# Altium PCB Control_PCB.PcbDoc
Units mm, origin at the board's own origin, x right, y up, seen from the top; angles counter-clockwise.
Board outline 174.6 x 82.6 mm, 2 copper layers (Top Layer, Bottom Layer); 270 components, 208 nets, 853 pads, 0 vias.
Unrouted connection lines stored in the file: 547.
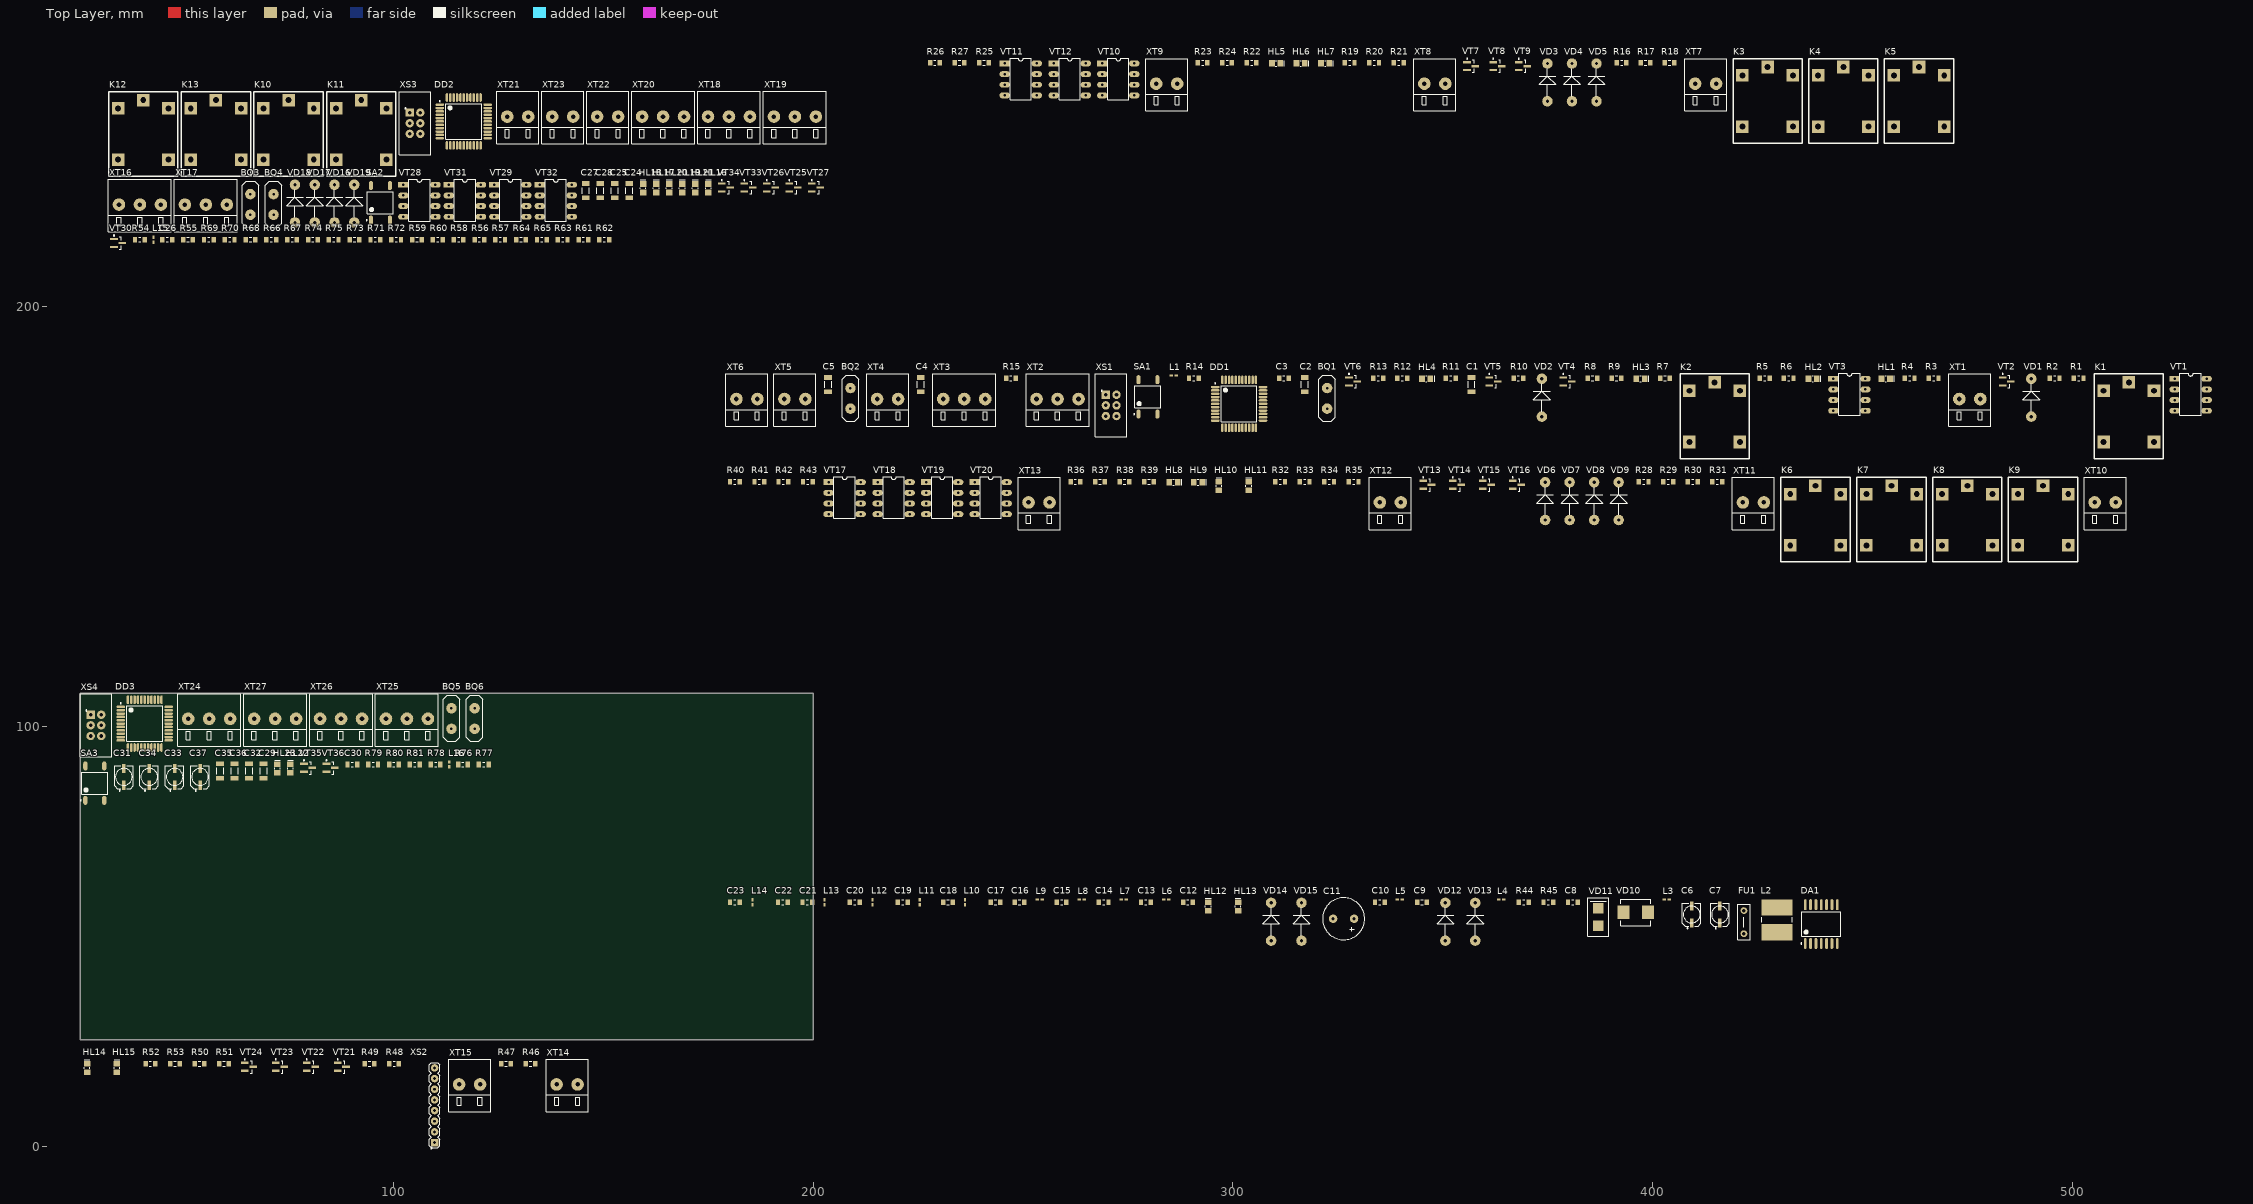
[diagram p0: Top Layer view]
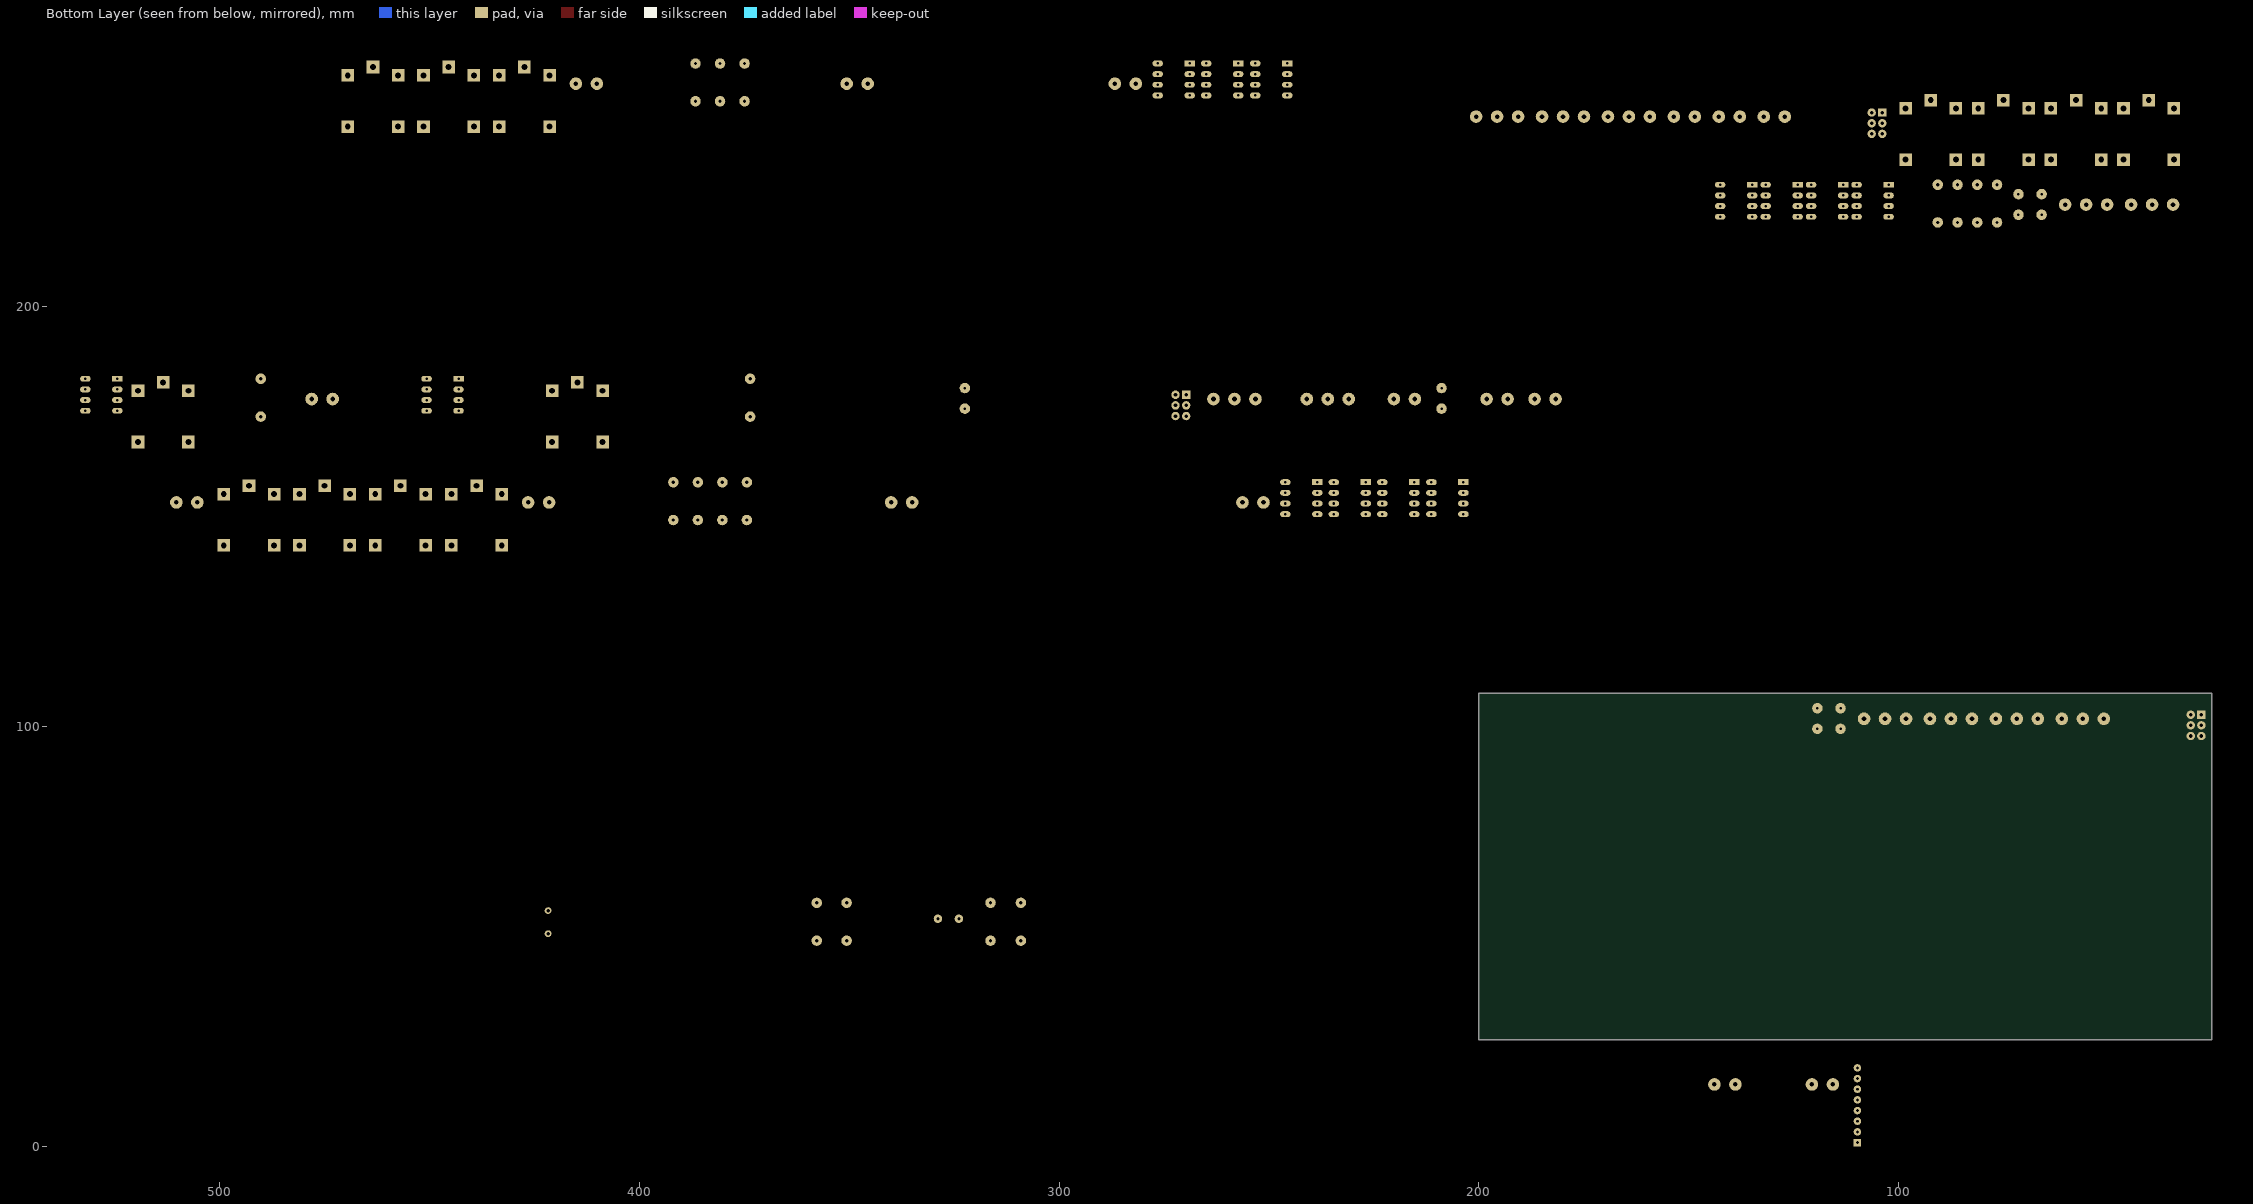
[diagram p1: Bottom Layer view, seen from below]

## Layer stack, top to bottom
Top Solder: solder mask 0.0102, Solder Resist, Dk 3.5
Top Layer: signal copper 0.0356
Dielectric 1: dielectric 0.32, FR-4, Dk 4.8
Bottom Layer: signal copper 0.0356
Bottom Solder: solder mask 0.0102, Solder Resist, Dk 3.5

## Board outline
25.4,25.4 200,25.4 200,108 25.4,108

## Design rules (kind name [scope] priority, off if disabled: settings)
Clearance [All] p1: gap=0.254
DiffPairsRouting [All] p1: maxlimit=0.254 minlimit=0.254 mostfreqgap=0.254 toplayer_minwidth=0.381 toplayer_maxwidth=0.381 toplayer_prefwidth=0.381 bottomlayer_minwidth=0.381 bottomlayer_maxwidth=0.381 bottomlayer_prefwidth=0.381 maxuncoupledlength=12.7
PolygonConnect [All] p1: connectstyle=Relief reliefconductorwidth=0.254 reliefentries=4 polygonreliefangle="90 Angle" airgapwidth=0.254
RoomDefinition Water_control_unit [InComponentClass('Water_control_unit')] p1: confinementstyle=ConfineIn formatcopy=TRUE lockcomponents=FALSE outline 178.943,163.576 533.527,163.576 533.527,186.944 178.943,186.944
RoomDefinition U_valveСontrol [InComponentClass('U_valveСontrol')] p2: confinementstyle=ConfineIn formatcopy=TRUE lockcomponents=FALSE outline 178.943,138.938 513.08,138.938 513.08,162.306 178.943,162.306
RoomDefinition U_heatersControl [InComponentClass('U_heatersControl')] p3: confinementstyle=ConfineIn formatcopy=TRUE lockcomponents=FALSE outline 226.623,238.696 472.114,238.696 472.114,262.064 226.623,262.064
RoomDefinition TopSCH [InComponentClass('TopSCH')] p4: confinementstyle=ConfineIn formatcopy=TRUE lockcomponents=FALSE outline 25.502,-1.37 146.66,-1.37 146.66,23.649 25.502,23.649
RoomDefinition Spin_control_unit [InComponentClass('Spin_control_unit')] p5: confinementstyle=ConfineIn formatcopy=TRUE lockcomponents=FALSE outline 31.781,207 204,207 204,251.937 31.781,251.937
RoomDefinition Power_unit [InComponentClass('Power_unit')] p6: confinementstyle=ConfineIn formatcopy=TRUE lockcomponents=FALSE outline 178.943,46.355 445.516,46.355 445.516,62.103 178.943,62.103
RoomDefinition Master_unit [InComponentClass('Master_unit')] p7: confinementstyle=ConfineIn formatcopy=TRUE lockcomponents=FALSE outline 25,79 125,79 125,108.482 25,108.482
RoutingVias [All] p1: holewidth=0.711 width=1.27 viastyle="Through Hole" minholewidth=0.711 minwidth=1.27 maxholewidth=0.711 maxwidth=1.27
SolderMaskExpansion [All] p1: expansion=0.102
Width [All] p1: maxlimit=0.254 minlimit=0.254 preferedwidth=0.254
28 further rules are at their usual default settings.

## Classes and differential pairs
component class Water_control_unit: BQ1 BQ2 C1 C2 C3 C4 C5 DD1 HL1 HL2 HL3 HL4 K1 K2 L1 R1 R2 R3 R4 R5 R6 R7 R8 R9 R10 R11 R12 R13 R14 R15 SA1 VD1 VD2 VT1 VT2 VT3 VT4 VT5 VT6 XS1 XT1 XT2 XT3 XT4 XT5 XT6
component class U_valveСontrol: HL8 HL9 HL10 HL11 K6 K7 K8 K9 R28 R29 R30 R31 R32 R33 R34 R35 R36 R37 R38 R39 R40 R41 R42 R43 VD6 VD7 VD8 VD9 VT13 VT14 VT15 VT16 VT17 VT18 VT19 VT20 XT10 XT11 XT12 XT13
component class U_heatersControl: HL5 HL6 HL7 K3 K4 K5 R16 R17 R18 R19 R20 R21 R22 R23 R24 R25 R26 R27 VD3 VD4 VD5 VT7 VT8 VT9 VT10 VT11 VT12 XT7 XT8 XT9
component class TopSCH: HL14 HL15 R46 R47 R48 R49 R50 R51 R52 R53 VT21 VT22 VT23 VT24 XS2 XT14 XT15
component class Spin_control_unit: BQ3 BQ4 C24 C25 C26 C27 C28 DD2 HL16 HL17 HL18 HL19 HL20 HL21 K10 K11 K12 K13 L15 R54 R55 R56 R57 R58 R59 R60 R61 R62 R63 R64 R65 R66 R67 R68 R69 R70 R71 R72 R73 R74 R75 SA2 VD16 VD17 VD18 VD19 VT25 VT26 VT27 VT28 VT29 VT30 VT31 VT32 VT33 VT34 XS3 XT16 XT17 XT18 XT19 XT20 XT21 XT22 XT23
component class Power_unit: C6 C7 C8 C9 C10 C11 C12 C13 C14 C15 C16 C17 C18 C19 C20 C21 C22 C23 DA1 FU1 HL12 HL13 L2 L3 L4 L5 L6 L7 L8 L9 L10 L11 L12 L13 L14 R44 R45 VD10 VD11 VD12 VD13 VD14 VD15
component class Master_unit: BQ5 BQ6 C29 C30 C31 C32 C33 C34 C35 C36 C37 DD3 HL22 HL23 L16 R76 R77 R78 R79 R80 R81 SA3 VT35 VT36 XS4 XT24 XT25 XT26 XT27
differential pair PRESSURE: +PRESSURE_P -PRESSURE_N

## Components (designator, comment, footprint, x,y, rotation, side; value= is the part's Value field where it differs from the comment)
BQ1 "16 МГц" HC-49/S 322.453,175.768 r90 top
BQ2 "32.768 кГц" HC-49/S 208.915,175.768 r90 top
BQ3 "16 МГц" HC-49/S 65.951,221.968 r90 top
BQ4 "32,768 кГц" HC-49/S 71.459,221.968 r90 top
BQ5 "16 МГц" HC-49/S 113.856,99.474 r90 top
BQ6 "32,768 кГц" HC-49/S 119.364,99.474 r90 top
C1 "CC0603JRNP09BN200" CAPC3216X05M 356.87,181.483 r90 top
C2 "CC0603JRNP09BN200" CAPC3216X05M 317.119,181.483 r90 top
C3 "100n" SMDRC0805 312.166,183.007 r0 top
C4 "CC0603JRNP09BN200" CAPC3216X05M 225.679,181.483 r90 top
C5 "CC0603JRNP09BN200" CAPC3216X05M 203.581,181.483 r90 top
C6 "CA050M2R20REB-0405" CAP_POLAR_ELLYTE_B 409.321,55.245 r90 top
C7 "CA016M0010REB-0405" CAP_POLAR_ELLYTE_B 416.052,55.245 r90 top
C8 "100n" SMDRC0805 381,58.166 r0 top
C9 "100n" SMDRC0805 345.059,58.166 r0 top
C10 "100n" SMDRC0805 335.026,58.166 r0 top
C11 "CA035M0220REG" CAP_POLAR_10mm 326.39,54.229 r0 top
C12 "100n" SMDRC0805 289.306,58.166 r0 top
C13 "100n" SMDRC0805 279.273,58.166 r0 top
C14 "100n" SMDRC0805 269.24,58.166 r0 top
C15 "100n" SMDRC0805 259.207,58.166 r0 top
C16 "100n" SMDRC0805 249.174,58.166 r0 top
C17 "100n" SMDRC0805 243.459,58.166 r0 top
C18 "100n" SMDRC0805 232.156,58.166 r0 top
C19 "100n" SMDRC0805 221.361,58.166 r0 top
C20 "100n" SMDRC0805 209.931,58.166 r0 top
C21 "100n" SMDRC0805 198.628,58.166 r0 top
C22 "100n" SMDRC0805 192.786,58.166 r0 top
C23 "100n" SMDRC0805 181.356,58.166 r0 top
C24 "CC0603JRNP09BN200" CAPC3216X05M 156.231,227.693 r90 top
C25 "CC0603JRNP09BN200" CAPC3216X05M 152.773,227.693 r90 top
C26 "100n" SMDRC0805 46.134,216.035 r0 top
C27 "CC0603JRNP09BN200" CAPC3216X05M 145.857,227.693 r90 top
C28 "CC0603JRNP09BN200" CAPC3216X05M 149.315,227.693 r90 top
C29 "CC0603JRNP09BN200" CAPC3216X05M 69.093,89.437 r90 top
C30 "100n" SMDRC0805 90.233,90.987 r0 top
C31 "CA050M2R20REB-0405" CAP_POLAR_ELLYTE_B 35.787,88.037 r90 top
C32 "CC0603JRNP09BN200" CAPC3216X05M 65.635,89.437 r90 top
C33 "CA050M2R20REB-0405" CAP_POLAR_ELLYTE_B 47.903,88.037 r90 top
C34 "CA050M2R20REB-0405" CAP_POLAR_ELLYTE_B 41.845,88.037 r90 top
C35 "CC0603JRNP09BN200" CAPC3216X05M 58.719,89.437 r90 top
C36 "CC0603JRNP09BN200" CAPC3216X05M 62.177,89.437 r90 top
C37 "CA050M2R20REB-0405" CAP_POLAR_ELLYTE_B 53.961,88.037 r90 top
DA1 "LM2574M-5.0" SOIC127P1030X264-14M 440.182,52.959 r90 top
DD1 "Atmega324P-20AU" 44ML_M 301.498,176.911 r0 top
DD2 "Atmega324P-20AU" 44ML_M 116.779,244.179 r0 top
DD3 "Atmega324P-20AU" 44ML_M 40.766,100.724 r0 top
FU1 "EFuse LP60-110F" "EFuse 1.1A" 421.767,50.673 r90 top
HL1 "Red" DIOMELF2012M 455.549,182.88 r0 top
HL2 "Orange" DIOMELF2012M 438.15,182.88 r0 top
HL3 "Orange" DIOMELF2012M 397.129,182.88 r0 top
HL4 "Red" DIOMELF2012M 346.075,182.88 r0 top
HL5 "Red" DIOMELF2012M 310.316,258 r0 top
HL6 "Red" DIOMELF2012M 316.158,258 r0 top
HL7 "Red" DIOMELF2012M 322,258 r0 top
HL8 "Red" DIOMELF2012M 285.877,158.242 r0 top
HL9 "Red" DIOMELF2012M 291.719,158.242 r0 top
HL10 "Red" DIOMELF2012M 296.672,157.353 r90 top
HL11 "Red" DIOMELF2012M 303.784,157.353 r90 top
HL12 "Green" DIOMELF2012M 294.132,57.15 r90 top
HL13 "Green" DIOMELF2012M 301.244,57.15 r90 top
HL14 "Orange" DIOMELF2012M 27.026,18.696 r90 top
HL15 "Orange" DIOMELF2012M 34.138,18.696 r90 top
HL16 "Orange" DIOMELF2012M 175.054,228.268 r90 top
HL17 "Orange" DIOMELF2012M 162.622,228.268 r90 top
HL18 "Red" DIOMELF2012M 159.514,228.268 r90 top
HL19 "Red" DIOMELF2012M 168.838,228.268 r90 top
HL20 "Red" DIOMELF2012M 165.73,228.268 r90 top
HL21 "Red" DIOMELF2012M 171.946,228.268 r90 top
HL22 "Orange" DIOMELF2012M 75.484,90.012 r90 top
HL23 "Orange" DIOMELF2012M 72.376,90.012 r90 top
K1 "TRU-5VDC-SB-CL" TRU-5VDC-SB-CL 521.716,184.023 r90 top
K2 "TRU-5VDC-SB-CL" TRU-5VDC-SB-CL 423.037,184.023 r90 top
K3 "TRU-5VDC-SB-CL" TRU-5VDC-SB-CL 435.665,259.143 r90 top
K4 "TRU-5VDC-SB-CL" TRU-5VDC-SB-CL 453.699,259.143 r90 top
K5 "TRU-5VDC-SB-CL" TRU-5VDC-SB-CL 471.733,259.143 r90 top
K6 "TRU-5VDC-SB-CL" TRU-5VDC-SB-CL 447.04,159.385 r90 top
K7 "TRU-5VDC-SB-CL" TRU-5VDC-SB-CL 465.201,159.385 r90 top
K8 "TRU-5VDC-SB-CL" TRU-5VDC-SB-CL 483.235,159.385 r90 top
K9 "TRU-5VDC-SB-CL" TRU-5VDC-SB-CL 501.269,159.385 r90 top
K10 "TRU-5VDC-SB-CL" TRU-5VDC-SB-CL 83.301,251.276 r90 top
K11 "TRU-5VDC-SB-CL" TRU-5VDC-SB-CL 100.609,251.276 r90 top
K12 "TRU-5VDC-SB-CL" TRU-5VDC-SB-CL 48.685,251.276 r90 top
K13 "TRU-5VDC-SB-CL" TRU-5VDC-SB-CL 65.993,251.276 r90 top
L1 "MPZ1608S181A" INDC0603X03M 285.877,183.642 r0 top
L2 "SCD0705T-331K-N" INDP7972X50M 429.641,53.975 r90 top
L3 "MPZ1608S181A" INDC0603X03M 403.352,58.801 r0 top
L4 "MPZ1608S181A" INDC0603X03M 363.982,58.801 r0 top
L5 "MPZ1608S181A" INDC0603X03M 339.725,58.801 r0 top
L6 "MPZ1608S181A" INDC0603X03M 284.099,58.801 r0 top
L7 "MPZ1608S181A" INDC0603X03M 274.066,58.801 r0 top
L8 "MPZ1608S181A" INDC0603X03M 264.033,58.801 r0 top
L9 "MPZ1608S181A" INDC0603X03M 254,58.801 r0 top
L10 "MPZ1608S181A" INDC0603X03M 236.22,58.166 r90 top
L11 "MPZ1608S181A" INDC0603X03M 225.425,58.166 r90 top
L12 "MPZ1608S181A" INDC0603X03M 214.122,58.166 r90 top
L13 "MPZ1608S181A" INDC0603X03M 202.692,58.166 r90 top
L14 "MPZ1608S181A" INDC0603X03M 185.547,58.166 r90 top
L15 "MPZ1608S181A" INDC0603X03M 42.876,216.035 r90 top
L16 "MPZ1608S181A" INDC0603X03M 113.323,90.987 r90 top
R1 "10" SMDRC0805 501.523,183.007 r0 top
R2 "10k" SMDRC0805 495.808,183.007 r0 top
R3 "150" SMDRC0805 466.979,183.007 r0 top
R4 "220" SMDRC0805 461.264,183.007 r0 top
R5 "10" SMDRC0805 426.72,183.007 r0 top
R6 "220" SMDRC0805 432.435,183.007 r0 top
R7 "100k" SMDRC0805 402.971,183.007 r0 top
R8 "10k" SMDRC0805 385.699,183.007 r0 top
R9 "150" SMDRC0805 391.414,183.007 r0 top
R10 "220" SMDRC0805 368.046,183.007 r0 top
R11 "220" SMDRC0805 351.917,183.007 r0 top
R12 "100k" SMDRC0805 340.36,183.007 r0 top
R13 "220" SMDRC0805 334.645,183.007 r0 top
R14 "220" SMDRC0805 290.703,183.007 r0 top
R15 "10k" SMDRC0805 247.142,183.007 r0 top
R16 "10k" SMDRC0805 392.612,258.127 r0 top
R17 "10k" SMDRC0805 398.327,258.127 r0 top
R18 "10k" SMDRC0805 404.042,258.127 r0 top
R19 "220" SMDRC0805 327.842,258.127 r0 top
R20 "220" SMDRC0805 333.684,258.127 r0 top
R21 "220" SMDRC0805 339.526,258.127 r0 top
R22 "10" SMDRC0805 304.474,258.127 r0 top
R23 "10" SMDRC0805 292.79,258.127 r0 top
R24 "10" SMDRC0805 298.632,258.127 r0 top
R25 "150" SMDRC0805 240.72,258.127 r0 top
R26 "150" SMDRC0805 229.036,258.127 r0 top
R27 "150" SMDRC0805 234.878,258.127 r0 top
R28 "10k" SMDRC0805 397.891,158.369 r0 top
R29 "10k" SMDRC0805 403.733,158.369 r0 top
R30 "10k" SMDRC0805 409.575,158.369 r0 top
R31 "10k" SMDRC0805 415.417,158.369 r0 top
R32 "220" SMDRC0805 311.277,158.369 r0 top
R33 "220" SMDRC0805 317.119,158.369 r0 top
R34 "220" SMDRC0805 322.961,158.369 r0 top
R35 "220" SMDRC0805 328.803,158.369 r0 top
R36 "10" SMDRC0805 262.509,158.369 r0 top
R37 "10" SMDRC0805 268.351,158.369 r0 top
R38 "10" SMDRC0805 274.193,158.369 r0 top
R39 "10" SMDRC0805 280.035,158.369 r0 top
R40 "150" SMDRC0805 181.356,158.369 r0 top
R41 "150" SMDRC0805 187.198,158.369 r0 top
R42 "150" SMDRC0805 192.913,158.369 r0 top
R43 "150" SMDRC0805 198.755,158.369 r0 top
R44 "750" SMDRC0805 369.316,58.166 r0 top
R45 "750" SMDRC0805 375.158,58.166 r0 top
R46 "4,7k" SMDRC0805 132.69,19.712 r0 top
R47 "4,7k" SMDRC0805 126.848,19.712 r0 top
R48 "270" SMDRC0805 100.178,19.712 r0 top
R49 "270" SMDRC0805 94.336,19.712 r0 top
R50 "100k" SMDRC0805 53.823,19.712 r0 top
R51 "100k" SMDRC0805 59.665,19.712 r0 top
R52 "220" SMDRC0805 42.139,19.712 r0 top
R53 "220" SMDRC0805 47.981,19.712 r0 top
R54 "220" SMDRC0805 39.618,216.035 r0 top
R55 "100k" SMDRC0805 51.092,216.035 r0 top
R56 "220" SMDRC0805 120.504,216.035 r0 top
R57 "100k" SMDRC0805 125.462,216.035 r0 top
R58 "220" SMDRC0805 115.546,216.035 r0 top
R59 "220" SMDRC0805 105.63,216.035 r0 top
R60 "10k" SMDRC0805 110.588,216.035 r0 top
R61 "150" SMDRC0805 145.294,216.035 r0 top
R62 "150" SMDRC0805 150.252,216.035 r0 top
R63 "220" SMDRC0805 140.336,216.035 r0 top
R64 "10" SMDRC0805 130.42,216.035 r0 top
R65 "10k" SMDRC0805 135.378,216.035 r0 top
R66 "10" SMDRC0805 70.924,216.035 r0 top
R67 "220" SMDRC0805 75.882,216.035 r0 top
R68 "150" SMDRC0805 65.966,216.035 r0 top
R69 "10" SMDRC0805 56.05,216.035 r0 top
R70 "150" SMDRC0805 61.008,216.035 r0 top
R71 "10" SMDRC0805 95.714,216.035 r0 top
R72 "220" SMDRC0805 100.672,216.035 r0 top
R73 "220" SMDRC0805 90.756,216.035 r0 top
R74 "10k" SMDRC0805 80.84,216.035 r0 top
R75 "10k" SMDRC0805 85.798,216.035 r0 top
R76 "220" SMDRC0805 116.581,90.987 r0 top
R77 "100k" SMDRC0805 121.539,90.987 r0 top
R78 "220" SMDRC0805 110.065,90.987 r0 top
R79 "100k" SMDRC0805 95.191,90.987 r0 top
R80 "220" SMDRC0805 100.149,90.987 r0 top
R81 "220" SMDRC0805 105.107,90.987 r0 top
SA1 "DTSM20-4.3" DTSM20 279.781,178.562 r90 top
SA2 "DTSM20-4.3" DTSM20 96.924,224.793 r90 top
SA3 "DTSM20-4.3" DTSM20 28.879,86.537 r90 top
VD1 "1N4001" PinDiode 490.22,173.863 r90 top
VD2 "1N4001" PinDiode 373.634,173.863 r90 top
VD3 "1N4001" PinDiode 374.959,248.983 r90 top
VD4 "1N4001" PinDiode 380.801,248.983 r90 top
VD5 "1N4001" PinDiode 386.643,248.983 r90 top
VD6 "1N4001" PinDiode 374.396,149.225 r90 top
VD7 "1N4001" PinDiode 380.238,149.225 r90 top
VD8 "1N4001" PinDiode 386.08,149.225 r90 top
VD9 "1N4001" PinDiode 391.922,149.225 r90 top
VD10 "SM15T12CA" SUPRES3216X18N 395.986,55.753 r0 top
VD11 "10BQ060TRPBF" "SHOTKY 4.1x3.3" 387.096,54.61 r90 top
VD12 "1N4001" PinDiode 350.647,49.022 r90 top
VD13 "1N4001" PinDiode 357.759,49.022 r90 top
VD14 "1N4001" PinDiode 309.118,49.022 r90 top
VD15 "1N4001" PinDiode 316.357,49.022 r90 top
VD16 "1N4001" PinDiode 85.983,220.117 r90 top
VD17 "1N4001" PinDiode 81.275,220.117 r90 top
VD18 "1N4001" PinDiode 76.567,220.117 r90 top
VD19 "1N4001" PinDiode 90.691,220.117 r90 top
VT1 "EL3184" DIP8 524.383,182.88 r0 top
VT2 "2N7002" "SOT23 (TO-236AB)" 484.378,182.245 r0 top
VT3 "EL3184" DIP8 443.103,182.88 r0 top
VT4 "2N7002" "SOT23 (TO-236AB)" 379.73,182.245 r0 top
VT5 "2N7002" "SOT23 (TO-236AB)" 362.077,182.245 r0 top
VT6 "2N7002" "SOT23 (TO-236AB)" 328.676,182.245 r0 top
VT7 "2N7002" "SOT23 (TO-236AB)" 356.798,257.365 r0 top
VT8 "2N7002" "SOT23 (TO-236AB)" 363.021,257.365 r0 top
VT9 "2N7002" "SOT23 (TO-236AB)" 369.117,257.365 r0 top
VT10 "EL3184" DIP8 268.914,258 r0 top
VT11 "EL3184" DIP8 245.673,258 r0 top
VT12 "EL3184" DIP8 257.357,258 r0 top
VT13 "2N7002" "SOT23 (TO-236AB)" 346.329,157.607 r0 top
VT14 "2N7002" "SOT23 (TO-236AB)" 353.441,157.607 r0 top
VT15 "2N7002" "SOT23 (TO-236AB)" 360.553,157.607 r0 top
VT16 "2N7002" "SOT23 (TO-236AB)" 367.665,157.607 r0 top
VT17 "EL3184" DIP8 203.708,158.242 r0 top
VT18 "EL3184" DIP8 215.392,158.242 r0 top
VT19 "EL3184" DIP8 226.949,158.242 r0 top
VT20 "EL3184" DIP8 238.506,158.242 r0 top
VT21 "2N7002" "SOT23 (TO-236AB)" 87.732,18.95 r0 top
VT22 "2N7002" "SOT23 (TO-236AB)" 80.366,18.95 r0 top
VT23 "2N7002" "SOT23 (TO-236AB)" 73,18.95 r0 top
VT24 "2N7002" "SOT23 (TO-236AB)" 65.634,18.95 r0 top
VT25 "2N7002" "SOT23 (TO-236AB)" 195.361,228.443 r0 top
VT26 "2N7002" "SOT23 (TO-236AB)" 190.003,228.443 r0 top
VT27 "2N7002" "SOT23 (TO-236AB)" 200.719,228.443 r0 top
VT28 "EL3184" DIP8 102.409,229.098 r0 top
VT29 "EL3184" DIP8 124.071,229.098 r0 top
VT30 "2N7002" "SOT23 (TO-236AB)" 34.46,215.235 r0 top
VT31 "EL3184" DIP8 113.24,229.098 r0 top
VT32 "EL3184" DIP8 134.902,229.098 r0 top
VT33 "2N7002" "SOT23 (TO-236AB)" 184.645,228.443 r0 top
VT34 "2N7002" "SOT23 (TO-236AB)" 179.287,228.443 r0 top
VT35 "2N7002" "SOT23 (TO-236AB)" 79.717,90.187 r0 top
VT36 "2N7002" "SOT23 (TO-236AB)" 85.075,90.187 r0 top
XS1 "IDC-06M" IDC-06M 269.748,179.07 r0 top
XS2 "PLS-08R" PLS-08R1 109.83,0.916 r90 top
XS3 "IDC-06M" IDC-06M 103.894,246.302 r0 top
XS4 "IDC-06M" IDC-06M 27.881,102.847 r0 top
XT1 "330-021-12" 330-021-12 473.075,178.054 r0 top
XT2 "330-031-12" 330-031-12 253.238,178.054 r0 top
XT3 "330-031-12" 330-031-12 231.013,178.054 r0 top
XT4 "330-021-12" 330-021-12 215.265,178.054 r0 top
XT5 "330-021-12" 330-021-12 193.167,178.054 r0 top
XT6 "330-021-12" 330-021-12 181.737,178.054 r0 top
XT7 "305-021-12" 330-021-12 410.138,253.174 r0 top
XT8 "305-021-12" 330-021-12 345.622,253.174 r0 top
XT9 "305-021-12" 330-021-12 281.741,253.174 r0 top
XT10 "305-021-12" 330-021-12 505.333,153.416 r0 top
XT11 "305-021-12" 330-021-12 421.513,153.416 r0 top
XT12 "305-021-12" 330-021-12 335.026,153.416 r0 top
XT13 "305-021-12" 330-021-12 251.333,153.416 r0 top
XT14 "330-021-12" 330-021-12 138.913,14.759 r0 top
XT15 "330-021-12" 330-021-12 115.672,14.759 r0 top
XT16 "330-031-12" 330-031-12 34.635,224.368 r0 top
XT17 "330-031-12" 330-031-12 50.343,224.368 r0 top
XT18 "330-031-12" 330-031-12 174.969,245.329 r0 top
XT19 "330-031-12" 330-031-12 190.677,245.329 r0 top
XT20 "330-031-12" 330-031-12 159.261,245.329 r0 top
XT21 "330-021-12" 330-021-12 127.137,245.329 r0 top
XT22 "305-021-12" 330-021-12 148.553,245.329 r0 top
XT23 "305-021-12" 330-021-12 137.845,245.329 r0 top
XT24 "330-031-12" 330-031-12 51.124,101.874 r0 top
XT25 "330-031-12" 330-031-12 98.248,101.874 r0 top
XT26 "330-031-12" 330-031-12 82.54,101.874 r0 top
XT27 "330-031-12" 330-031-12 66.832,101.874 r0 top

## Footprints (in the part's own frame and the unit in brackets; to place one, negate y for a bottom-side part, rotate by r counter-clockwise, add the part's x,y. Pads: shape width x height; smd on the part's side, far side on the other; paste and mask are expansions set on the pad)
44ML_M [mm] "Thin QFP, 44-Leads, Body 10x10mm, Pitch 0.8mm, IPC Low Density"
  oval 2.05x0.6 smd: 1(-5.7,4) 2(-5.7,3.2) 3(-5.7,2.4) 4(-5.7,1.6) 5(-5.7,0.8) 6(-5.7,0) 7(-5.7,-0.8) 8(-5.7,-1.6) 9(-5.7,-2.4) 10(-5.7,-3.2) 11(-5.7,-4) 23(5.7,-4) 24(5.7,-3.2) 25(5.7,-2.4) 26(5.7,-1.6) 27(5.7,-0.8) 28(5.7,0) 29(5.7,0.8) 30(5.7,1.6) 31(5.7,2.4) 32(5.7,3.2) 33(5.7,4)
  oval 0.6x2.05 smd: 12(-4,-5.7) 13(-3.2,-5.7) 14(-2.4,-5.7) 15(-1.6,-5.7) 16(-0.8,-5.7) 17(0,-5.7) 18(0.8,-5.7) 19(1.6,-5.7) 20(2.4,-5.7) 21(3.2,-5.7) 22(4,-5.7) 34(4,5.7) 35(3.2,5.7) 36(2.4,5.7) 37(1.6,5.7) 38(0.8,5.7) 39(0,5.7) 40(-0.8,5.7) 41(-1.6,5.7) 42(-2.4,5.7) 43(-3.2,5.7) 44(-4,5.7)
  silkscreen extent -5.82,-4.25 4.25,4.97, body extent -5,-5 5,5, height 1.2
330-021-12 [mm]
  round 3 hole 1.1: 1(0,0) 2(5,0)
  silkscreen extent -2.5,-6.5 7.5,6, body extent -2.5,-6.5 7.5,6, height 12.5
330-031-12 [mm]
  round 3 hole 1.1: 1(0,0) 2(5,0) 3(10,0)
  silkscreen extent -2.5,-6.5 12.5,6, body extent -2.5,-6.5 12.5,6, height 12.5
CAP_POLAR_10mm [mm] "Polar through-hole capactitor 10mm diamiter"
  round 2 hole 0.75: 1(-2.5,0) 2(2.5,0)
  silkscreen extent -5,-5 5,5, body extent -5.08,-5.08 5.08,5.08, height 10.16
CAP_POLAR_ELLYTE_B [mm] "Surface Mount Aluminum Electrolytic (size code B)"
  rect 2.2x0.85 smd: 1(2,0) 2(-2,0)
  silkscreen extent -3.42,-2.2 2.7,2.2, body extent -2.3,-2.15 2.3,2.15, height 5.41
CAPC3216X05M [mm] "Chip Capacitor, 2-Leads, Body 3,20x1,60mm, IPC Low Density"
  rect 1.1x1.85 smd: 1(-1.7,0) 2(1.7,0)
  silkscreen extent -0.75,-0.82 0.75,0.82, body extent -1.6,-0.8 1.6,0.8, height 0.5
DIOMELF2012M [mm] "MELF Diode, 2-Leads, Body 2,00x1,20mm, IPC Low Density"
  rect 1.35x1.55 smd: 1(-1,0) 2(1,0)
  silkscreen extent -0.15,-0.67 1.97,0.67, body extent -1,-0.6 1,0.6, height 1.2
DIP8 [mm]
  rect 2.5x1.4 hole 0.6: 1(0,0)
  oval 2.5x1.4 hole 0.6: 2(0,-2.54) 3(0,-5.08) 4(0,-7.62) 5(7.62,-7.62) 6(7.62,-5.08) 7(7.62,-2.54) 8(7.62,0)
  silkscreen extent 1.27,-8.64 6.35,1.27, body extent 1.27,-8.89 6.35,1.27, height 3
DTSM20 [mm] "DTSM20 button footprint"
  oval 2.15x1 smd: 1(-4.1,2.25) 1(4.1,2.25) 2(-4.1,-2.25) 2(4.1,-2.25)
  silkscreen extent -4.22,-3.1 2.63,3.42, body extent -3.1,-3.1 3.1,3.1, height 5.5
"EFuse 1.1A" [mm]
  round 1.6 hole 0.85: 1(0,0) 2(5.5,0)
  silkscreen extent -1.5,-1.5 7,1.5, body extent -3.23,-0.5 8.73,0.5, height 12.99
HC-49/S [mm]
  round 2.5 hole 0.6: 1(0,0) 2(4.9,0)
  silkscreen extent -3,-2 8,2, body extent -3.5,-2.5 8.5,2.5, height 3.5
IDC-06M [mm]
  rect 2x2 hole 0.85: 1(0,0)
  round 2 hole 0.85: 2(2.54,0) 3(0,-2.54) 4(2.54,-2.54) 5(0,-5.08) 6(2.54,-5.08)
  silkscreen extent -2.5,-10 5,5, body extent -2.5,-10 5,5, height 8.4
INDC0603X03M [mm] "Chip Inductor, 2-Leads, Body 0,60x0,30mm, IPC Low Density"
  rect 0.82x0.52 smd: 1(-0.595,0) 2(0.595,0)
  body extent -0.3,-0.15 0.3,0.15, height 0.3
INDP7972X50M [mm] "Precision Wire Wound Inductor, 2-Leads, Body 7,90x7,20mm, IPC Low Density"
  rect 3.9x7.4 smd: 1(-2.95,0) 2(2.95,0)
  silkscreen extent -0.6,-3.6 0.6,3.6, body extent -3.95,-3.6 3.95,3.6, height 5
PinDiode [mm] "Simple pin diode with A and K designators"
  round 2.5 hole 0.8: A(0,0) K(9,0)
  silkscreen extent 1.2,-2 7.8,2, body extent -0.4,-1.4 9.4,1.4, height 2.79
PLS-08R1 [mm] "угловая вилка на плату"
  rect 1.8x1.8 hole 0.7: 1(0,0)
  round 1.8 hole 0.7: 2(2.54,0) 3(5.08,0) 4(7.62,0) 5(10.16,0) 6(12.7,0) 7(15.24,0) 8(17.78,0)
  silkscreen extent -1.47,-1.27 19.05,1.27, body extent -1.28,-1.25 19.05,6, height 6.1
"SHOTKY 4.1x3.3" [mm]
  rect 2.5x2.5 smd: A(-2.1,0) K(2.1,0)
  silkscreen extent -4.6,-2.5 4.6,2.5
SMDRC0805 [mm] "Chip Resistor, 2-Leads, Body 2,00x1,20mm, IPC Low Density"
  rect 1.05x1.35 smd: 1(-1.15,0) 2(1.15,0)
  silkscreen extent -0.25,-0.58 0.25,0.58, body extent -1,-0.6 1,0.6, height 0.4
SOIC127P1030X264-14M [mm] "SOIC, 14-Leads, Body 8,99x7,49mm, Pitch 1,27mm, IPC Low Density"
  oval 2.6x0.7 smd: 1(-4.625,3.81) 2(-4.625,2.54) 3(-4.625,1.27) 4(-4.625,0) 5(-4.625,-1.27) 6(-4.625,-2.54) 7(-4.625,-3.81) 8(4.625,-3.81) 9(4.625,-2.54) 10(4.625,-1.27) 11(4.625,0) 12(4.625,1.27) 13(4.625,2.54) 14(4.625,3.81)
  silkscreen extent -4.75,-4.6 2.93,4.83, body extent -3.8,-4.6 3.8,4.6, height 2.65
"SOT23 (TO-236AB)" [mm] "SOT23, 3-Leads, Body 2,90x2,45mm, Pitch 0,95mm, IPC Low Density"
  rect 1.8x0.55 smd: 1(-1,0.95) 2(-1,-0.95) 3(1,0)
  silkscreen extent -1.12,-1.5 0.7,1.9, body extent -0.7,-1.5 0.7,1.5, height 1.1
SUPRES3216X18N [mm]
  rect 2.9x3.25 smd: 1(-2.9,0) 2(2.9,0)
  silkscreen extent -3.6,-3.15 3.6,3.15, body extent -3.57,-3.13 3.58,3.13, height 2.65
TRU-5VDC-SB-CL [mm]
  rect 3x3 hole 1.4: 1(-4,14.25) 2(-4,2.25) 3(-2,8.25) 4(-16.2,14.25) 5(-16.2,2.25)
  silkscreen extent -20.15,0 0,16.5, body extent -20.23,-0.01 0.15,16.62, height 21.2

## Part data
BQ1 BQ2 BQ3 BQ4 BQ5 BQ6: library part Piezoelectric_16000, "Piezoelectric elements"
C1 C2 C4 C5 C24 C25 C27 C28 C29 C32 C35 C36: library part p00020_050, "20pF Bipolar cap"
C3 C8 C9 C10 C12 C13 C14 C15 C16 C17 C18 C19 C20 C21 C22 C23 C26 C30: library part "Capacitor 0805 100n", "Generic capasitor non-polar"
C6 C31 C33 C34 C37: library part 02200_050, "2,2uF 50V Polar capacitor"
C7: library part 10000_016, "10uF 16V Polar SMD cap"
C11: library part 470000_050, "470uF 50V Polar capacitor"
DD1 DD2 DD3: "Microcontroller 8-bit"
FU1: "Fuse"
HL1 HL4 HL5 HL6 HL7 HL8 HL9 HL10 HL11 HL18 HL19 HL20 HL21: library part LED1_R, "Diod LED SMD Red"
HL2 HL3 HL14 HL15 HL16 HL17 HL22 HL23: library part LED1_O, "Diod LED SMD Orange"
HL12 HL13: library part LED1_G, "Diod LED SMD Green"
L1 L3 L4 L5 L6 L7 L8 L9 L10 L11 L12 L13 L14 L15 L16: library part "Ferrite Bead", "Ferrite Bead"
L2: "Inductor"
R1 R5 R22 R23 R24 R36 R37 R38 R39 R64 R66 R69 R71: library part "Resistor 0805 10", "Generic resistor"
R2 R8 R15 R16 R17 R18 R28 R29 R30 R31 R60 R65 R74 R75: library part "Resistor 0805 10k", "Generic resistor"
R3 R9 R25 R26 R27 R40 R41 R42 R43 R61 R62 R68 R70: library part "Resistor 0805 150", "Generic resistor"
R4 R6 R10 R11 R13 R14 R19 R20 R21 R32 R33 R34 R35 R52 R53 R54 R56 R58 R59 R63 R67 R72 R73 R76 R78 R80 R81: library part "Resistor 0805 220", "Generic resistor"
R7 R12 R50 R51 R55 R57 R77 R79: library part "Resistor 0805 100k", "Generic resistor"
R44 R45: library part "Resistor 0805 750", "Generic resistor"
R46 R47: library part "Resistor 0805 4,7k", "Generic resistor"
R48 R49: library part "Resistor 0805 270", "Generic resistor"
SA1 SA2 SA3: library part Switch1_DTSM20-4.3, "Switch open"
VD1 VD2 VD3 VD4 VD5 VD6 VD7 VD8 VD9 VD12 VD13 VD14 VD15 VD16 VD17 VD18 VD19: "Rectifying diode"
VD10: "Diod suppressor"
VD11: "DIODE SCHOTTKY 60V 1A DO214AA"
VT1 VT3 VT10 VT11 VT12 VT17 VT18 VT19 VT20 VT28 VT29 VT31 VT32: "Optocouple IGBT driver"
VT2 VT4 VT5 VT6 VT7 VT8 VT9 VT13 VT14 VT15 VT16 VT21 VT22 VT23 VT24 VT25 VT26 VT27 VT30 VT33 VT34 VT35 VT36: library part "2N7002 n-MOSFET", "60V, 300mA N-channel Trench MOSFET"
XS1 XS3 XS4: library part "Con6_M IDC-06M_SPI", "SPI connector"
XS2: library part "Con8_M PLS-08MR", "Male 8-pin connection"
XT1 XT4 XT5 XT6 XT14 XT15 XT21: library part "Con2_D 330-021-12", "Demountable connection  2-pin"
XT2 XT3 XT16 XT17 XT18 XT19 XT20 XT24 XT25 XT26 XT27: library part "Con3_D 330-031-12", "Demountable connection 3-pin"
XT7 XT8 XT9 XT10 XT11 XT12 XT13 XT22 XT23: library part "Con2_D 305-021-12", "Demountable connection  2-pin"

## Nets (pads, with @x,y where several pads share a name; then routed paths per layer and width w, separated by ;. In a path a pad name is that pad's centre, name@x,y a point inside that pad or via, vN(x,y) a via of type N, cw(c..) or ccw(c..) an arc to the next point about the centre after c; other vN are vias at no path point)
220V_N.C3: K5.4
220V_N.C8: K7.4
220V_N.C9: K8.4
220V_N.C10: K3.4
220V_N.C12: K4.4
220V_N.C13: K6.4
220V_N.C19: K12.4
220V_N.C25: K9.4
220V_N.C26: K13.4
220V_N.O3: K5.3 XT9.1
220V_N.O8: K7.3 XT11.1
220V_N.O9: K8.3 XT12.1
220V_N.O10: K3.3 XT7.1
220V_N.O11: K4.3 XT8.1
220V_N.O13: K6.3 XT10.1
220V_N.O19: K12.3 XT22.1
220V_N.O25: K9.3 XT13.1
220V_N.O26: K13.3 XT23.1
220V_ZERO3: K5.5 XT9.2
220V_ZERO8: K7.5 XT11.2
220V_ZERO9: K8.5 XT12.2
220V_ZERO10: K3.5 XT7.2
220V_ZERO11: K4.5 XT8.2
220V_ZERO13: K6.5 XT10.2
220V_ZERO19: K12.5 XT22.2
220V_ZERO25: K9.5 XT13.2
220V_ZERO26: K13.5 XT23.2
+5V: C7.2 C31.2 C33.2 C34.2 C37.2 DA1.3 HL1.1 HL2.1 HL3.1 HL4.1 HL5.1 HL6.1 HL7.1 HL8.1 HL9.1 HL10.1 HL14.1 HL15.1 HL16.1 HL17.1 HL18.1 HL19.1 HL20.1 HL21.1 HL22.1 HL23.1 K1.1 K2.1 K3.1 K4.1 K5.1 K6.1 K7.1 K8.1 K10.1 K11.1 K12.1 K13.1 L1.1 L2.1 L3.1 L4.1 L5.1 L6.1 L7.1 L8.1 L9.1 L10.1 L11.1 L12.1 L13.1 L14.1 L15.1 L16.1 R1.2 R5.2 R15.2 R22.2 R23.2 R24.2 R36.2 R37.2 R38.2 R39.2 R45.2 R46.2 R47.2 R50.2 R51.2 R64.2 R66.2 R69.2 R71.2 VD1.K VD2.K VD3.K VD4.K VD5.K VD6.K VD7.K VD8.K VD16.K VD17.K VD18.K VD19.K XT2.1 XT3.1 XT5.1 XT16.1 XT17.1 XT18.1 XT19.1 XT20.1 XT24.1 XT25.1 XT26.1 XT27.1
+12V: K1.5 K2.5 K10.5 K11.5 XT15.1
ACMOTOR_FORWARD: DD2.41 R62.1
ACMOTOR_REVERSE: DD2.42 R70.1
AGND: C12.1 C13.1 C17.1 C18.1 C22.1 C23.1 C31.1 C33.1 C34.1 C37.1 DD1.28 DD2.28 DD3.28 XT4.2 XT6.2 XT24.2 XT25.2 XT26.2 XT27.2
CURRENT_SENS1: DD3.37 XT24.3
CURRENT_SENS2: DD3.36 XT25.3
CURRENT_SENS3: DD3.35 XT26.3
CURRENT_SENS4: DD3.34 XT27.3
DCMOTOR2_FORWARD: DD2.44 R61.1
DCMOTOR2_REVERSE: DD2.43 R68.1
DCMOTOR_FORWARD: DD1.9 R3.1
DCMOTOR_REVERSE: DD1.10 R9.1
GND: C1.2 C2.2 C3.2 C4.2 C5.2 C6.1 C7.1 C8.1 C9.1 C10.1 C11.1 C14.1 C15.1 C16.1 C19.1 C20.1 C21.1 C24.2 C25.2 C26.2 C27.2 C28.2 C29.2 C30.2 C32.2 C35.2 C36.2 DA1.4 DA1.5 DA1.6 DD1.6 DD1.18 DD1.39 DD2.6 DD2.18 DD2.39 DD3.6 DD3.18 DD3.39 HL12.2 HL13.2 K1.4 K2.4 K10.4 K11.4 R2.2 R7.2 R8.2 R12.2 R16.2 R17.2 R18.2 R28.2 R29.2 R30.2 R31.2 R55.2 R57.2 R60.2 R65.2 R74.2 R75.2 R77.2 R79.2 SA1.2 SA2.2 SA3.2 VD10.1 VD11.A VD14.A VD15.A VT1.3 VT1.5 VT2.2 VT3.3 VT3.5 VT4.2 VT5.2 VT6.2 VT7.2 VT8.2 VT9.2 VT10.3 VT10.5 VT11.3 VT11.5 VT12.3 VT12.5 VT13.2 VT14.2 VT15.2 VT16.2 VT17.3 VT17.5 VT18.3 VT18.5 VT19.3 VT19.5 VT20.3 VT20.5 VT21.2 VT22.2 VT23.2 VT24.2 VT25.2 VT26.2 VT27.2 VT28.3 VT28.5 VT29.3 VT29.5 VT30.2 VT31.3 VT31.5 VT32.3 VT32.5 VT33.2 VT34.2 VT35.2 VT36.2 XS1.6 XS2.8 XS3.6 XS4.6 XT2.3 XT3.3 XT15.2 XT16.3 XT17.3 XT18.3 XT19.3 XT20.3
HEATER1: DD1.44 R25.1
HEATER2: DD1.43 R26.1
HEATER3: DD1.42 R27.1
LIMIT_SWITCH1: DD1.11 XT2.2
LIMIT_SWITCH2: DD1.12 XT3.2
LIMIT_SWITCH3: DD2.12 XT16.2
LIMIT_SWITCH4: DD2.13 XT17.2
LIMIT_SWITCH5: DD2.14 XT18.2
LIMIT_SWITCH6: DD2.15 XT19.2
LIMIT_SWITCH7: DD2.16 XT20.2
MISO: DD3.2 R81.1 XS4.1
MOSI: DD3.1 R80.1 XS4.4
NetBQ1_1: BQ1.1 C2.1 DD1.8
NetBQ1_2: BQ1.2 C1.1 DD1.7
NetBQ2_1: BQ2.1 C5.1 DD1.26
NetBQ2_2: BQ2.2 C4.1 DD1.25
NetBQ3_1: BQ3.1 C25.1 DD2.8
NetBQ3_2: BQ3.2 C24.1 DD2.7
NetBQ4_1: BQ4.1 C28.1 DD2.26
NetBQ4_2: BQ4.2 C27.1 DD2.25
NetBQ5_1: BQ5.1 C32.1 DD3.8
NetBQ5_2: BQ5.2 C29.1 DD3.7
NetBQ6_1: BQ6.1 C36.1 DD3.26
NetBQ6_2: BQ6.2 C35.1 DD3.25
NetC3_1: C3.1 L1.2 XS1.2
NetC6_2: C6.2 DA1.10 FU1.2 R44.2 VD10.2
NetC8_2: C8.2 DD1.5 L3.2
NetC9_2: C9.2 DD1.17 L4.2
NetC10_2: C10.2 DD1.38 L5.2
NetC11_2: C11.2 FU1.1 VD12.K VD13.K
NetC12_2: C12.2 DD1.29
NetC13_2: C13.2 DD1.27 L6.2
NetC14_2: C14.2 DD2.5 L7.2
NetC15_2: C15.2 DD2.17 L8.2
NetC16_2: C16.2 DD2.38 L9.2
NetC17_2: C17.2 DD2.29
NetC18_2: C18.2 DD2.27 L10.2
NetC19_2: C19.2 DD3.5 L11.2
NetC20_2: C20.2 DD3.17 L12.2
NetC21_2: C21.2 DD3.38 L13.2
NetC22_2: C22.2 DD3.29
NetC23_2: C23.2 DD3.27 L14.2
NetC26_1: C26.1 L15.2 XS3.2
NetC30_1: C30.1 L16.2 XS4.2
NetDA1_12: DA1.12 L2.2 VD11.K
NetDD1_1: DD1.1 R13.1 XS1.4
NetDD1_2: DD1.2 R14.1 XS1.1
NetDD1_3: DD1.3 XS1.3
NetDD1_4: DD1.4 SA1.1 XS1.5
NetDD1_19: DD1.19 DD2.19 DD3.19 R46.1 R48.2 XS2.5
NetDD1_20: DD1.20 DD2.20 DD3.20 R47.1 R49.2 XS2.6
NetDD2_1: DD2.1 R58.1 XS3.4
NetDD2_2: DD2.2 R59.1 XS3.1
NetDD2_3: DD2.3 XS3.3
NetDD2_4: DD2.4 SA2.1 XS3.5
NetDD3_12: DD3.12 XS2.7
NetDD3_13: DD3.13 XS2.3
NetDD3_14: DD3.14 XS2.4
NetHL1_2: HL1.2 R4.2
NetHL2_2: HL2.2 R6.2
NetHL3_2: HL3.2 R10.2
NetHL4_2: HL4.2 R11.2
NetHL5_2: HL5.2 R19.2
NetHL6_2: HL6.2 R20.2
NetHL7_2: HL7.2 R21.2
NetHL8_2: HL8.2 R32.2
NetHL9_2: HL9.2 R33.2
NetHL10_2: HL10.2 R34.2
NetHL11_1: HL11.1 K9.1 VD9.K
NetHL11_2: HL11.2 R35.2
NetHL12_1: HL12.1 R44.1
NetHL13_1: HL13.1 R45.1
NetHL14_2: HL14.2 R52.2
NetHL15_2: HL15.2 R53.2
NetHL16_2: HL16.2 R54.2
NetHL17_2: HL17.2 R56.2
NetHL18_2: HL18.2 R63.2
NetHL19_2: HL19.2 R67.2
NetHL20_2: HL20.2 R73.2
NetHL21_2: HL21.2 R72.2
NetHL22_2: HL22.2 R76.2
NetHL23_2: HL23.2 R78.2
NetK1_2: K1.2 R4.1 VD1.A VT2.3
NetK1_3: K1.3 XT1.1
NetK2_2: K2.2 R11.1 VD2.A VT5.3
NetK2_3: K2.3 XT1.2
NetK3_2: K3.2 R19.1 VD3.A VT7.3
NetK4_2: K4.2 R20.1 VD4.A VT8.3
NetK5_2: K5.2 R21.1 VD5.A VT9.3
NetK6_2: K6.2 R32.1 VD6.A VT13.3
NetK7_2: K7.2 R33.1 VD7.A VT14.3
NetK8_2: K8.2 R34.1 VD8.A VT15.3
NetK9_2: K9.2 R35.1 VD9.A VT16.3
NetK10_2: K10.2 R63.1 VD16.A VT27.3
NetK10_3: K10.3 XT21.1
NetK11_2: K11.2 R67.1 VD17.A VT30.3
NetK11_3: K11.3 XT21.2
NetK12_2: K12.2 R72.1 VD18.A VT33.3
NetK13_2: K13.2 R73.1 VD19.A VT34.3
NetR1_1: R1.1 VT1.8
NetR2_1: R2.1 VT1.7 VT2.1
NetR3_2: R3.2 VT1.2
NetR5_1: R5.1 VT3.8
NetR6_1: R6.1 VT4.3
NetR7_1: R7.1 R13.2 VT4.1
NetR8_1: R8.1 VT3.7 VT5.1
NetR9_2: R9.2 VT3.2
NetR10_1: R10.1 VT6.3
NetR12_1: R12.1 R14.2 VT6.1
NetR16_1: R16.1 VT7.1 VT10.7
NetR17_1: R17.1 VT8.1 VT11.7
NetR18_1: R18.1 VT9.1 VT12.7
NetR22_1: R22.1 VT10.8
NetR23_1: R23.1 VT11.8
NetR24_1: R24.1 VT12.8
NetR25_2: R25.2 VT10.2
NetR26_2: R26.2 VT11.2
NetR27_2: R27.2 VT12.2
NetR28_1: R28.1 VT13.1 VT17.7
NetR29_1: R29.1 VT14.1 VT18.7
NetR30_1: R30.1 VT15.1 VT19.7
NetR31_1: R31.1 VT16.1 VT20.7
NetR36_1: R36.1 VT17.8
NetR37_1: R37.1 VT18.8
NetR38_1: R38.1 VT19.8
NetR39_1: R39.1 VT20.8
NetR40_2: R40.2 VT17.2
NetR41_2: R41.2 VT18.2
NetR42_2: R42.2 VT19.2
NetR43_2: R43.2 VT20.2
NetR48_1: R48.1 VT21.1
NetR49_1: R49.1 VT22.1
NetR50_1: R50.1 VT21.3 VT23.1
NetR51_1: R51.1 VT22.3 VT24.1
NetR52_1: R52.1 VT23.3
NetR53_1: R53.1 VT24.3
NetR54_1: R54.1 VT25.3
NetR55_1: R55.1 R58.2 VT25.1
NetR56_1: R56.1 VT26.3
NetR57_1: R57.1 R59.2 VT26.1
NetR60_1: R60.1 VT27.1 VT28.7
NetR61_2: R61.2 VT28.2
NetR62_2: R62.2 VT29.2
NetR64_1: R64.1 VT28.8
NetR65_1: R65.1 VT30.1 VT32.7
NetR66_1: R66.1 VT31.8
NetR68_2: R68.2 VT32.2
NetR69_1: R69.1 VT29.8
NetR70_2: R70.2 VT31.2
NetR71_1: R71.1 VT32.8
NetR74_1: R74.1 VT29.7 VT33.1
NetR75_1: R75.1 VT31.7 VT34.1
NetR76_1: R76.1 VT35.3
NetR77_1: R77.1 R80.2 VT35.1
NetR78_1: R78.1 VT36.3
NetR79_1: R79.1 R81.2 VT36.1
PRESSURE_N: DD1.35 XT6.1
PRESSURE_P: DD1.36 XT5.2
RESET: DD3.4 SA3.1 XS4.5
SCK: DD3.3 XS4.3
THERM_SENS: DD1.37 R15.1 XT4.1
VALVE1: DD1.13 R40.1
VALVE2: DD1.14 R41.1
VALVE3: DD1.15 R42.1
VALVE4: DD1.16 R43.1
~12V_PHASE: VD12.A VD14.K XS2.1 XT14.1
~12V_ZERO: VD13.A VD15.K XS2.2 XT14.2
pads on no net: DA1.1 DA1.2 DA1.7 DA1.8 DA1.9 DA1.11 DA1.13 DA1.14 DD1.21 DD1.22 DD1.23 DD1.24 DD1.30 DD1.31 DD1.32 DD1.33 DD1.34 DD1.40 DD1.41 DD2.9 DD2.10 DD2.11 DD2.21 DD2.22 DD2.23 DD2.24 DD2.30 DD2.31 DD2.32 DD2.33 DD2.34 DD2.35 DD2.36 DD2.37 DD2.40 DD3.9 DD3.10 DD3.11 DD3.15 DD3.16 DD3.21 DD3.22 DD3.23 DD3.24 DD3.30 DD3.31 DD3.32 DD3.33 DD3.40 DD3.41 DD3.42 DD3.43 DD3.44 VT1.1 VT1.4 VT1.6 VT3.1 VT3.4 VT3.6 VT10.1 VT10.4 VT10.6 VT11.1 VT11.4 VT11.6 VT12.1 VT12.4 VT12.6 VT17.1 VT17.4 VT17.6 VT18.1 VT18.4 VT18.6 VT19.1 VT19.4 VT19.6 VT20.1 VT20.4 VT20.6 VT28.1 VT28.4 VT28.6 VT29.1 VT29.4 VT29.6 VT31.1 VT31.4 VT31.6 VT32.1 VT32.4 VT32.6